# EAGLE board ir (EAGLE 9.5.1)
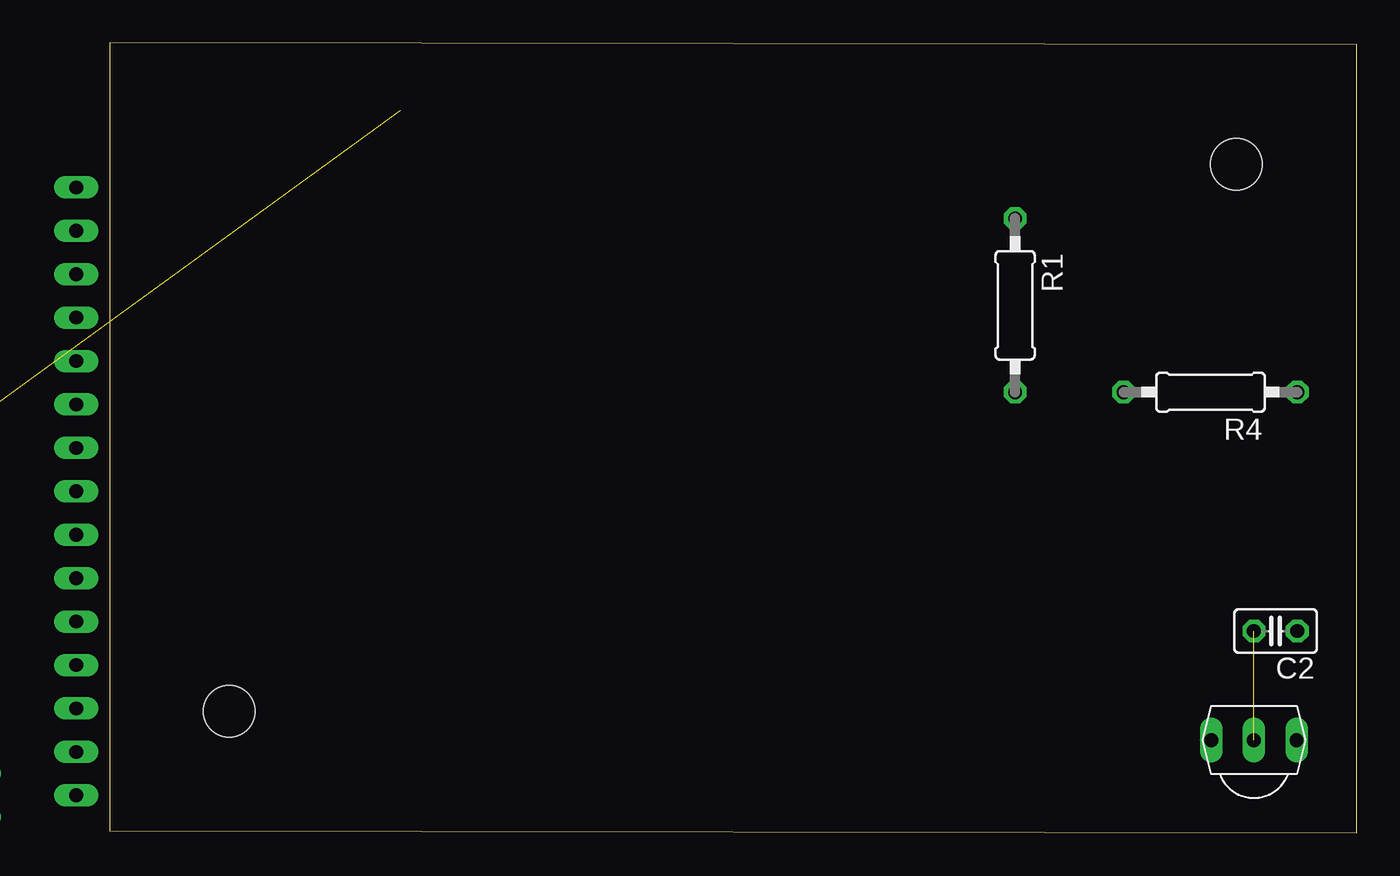
[diagram p0: board, top side]
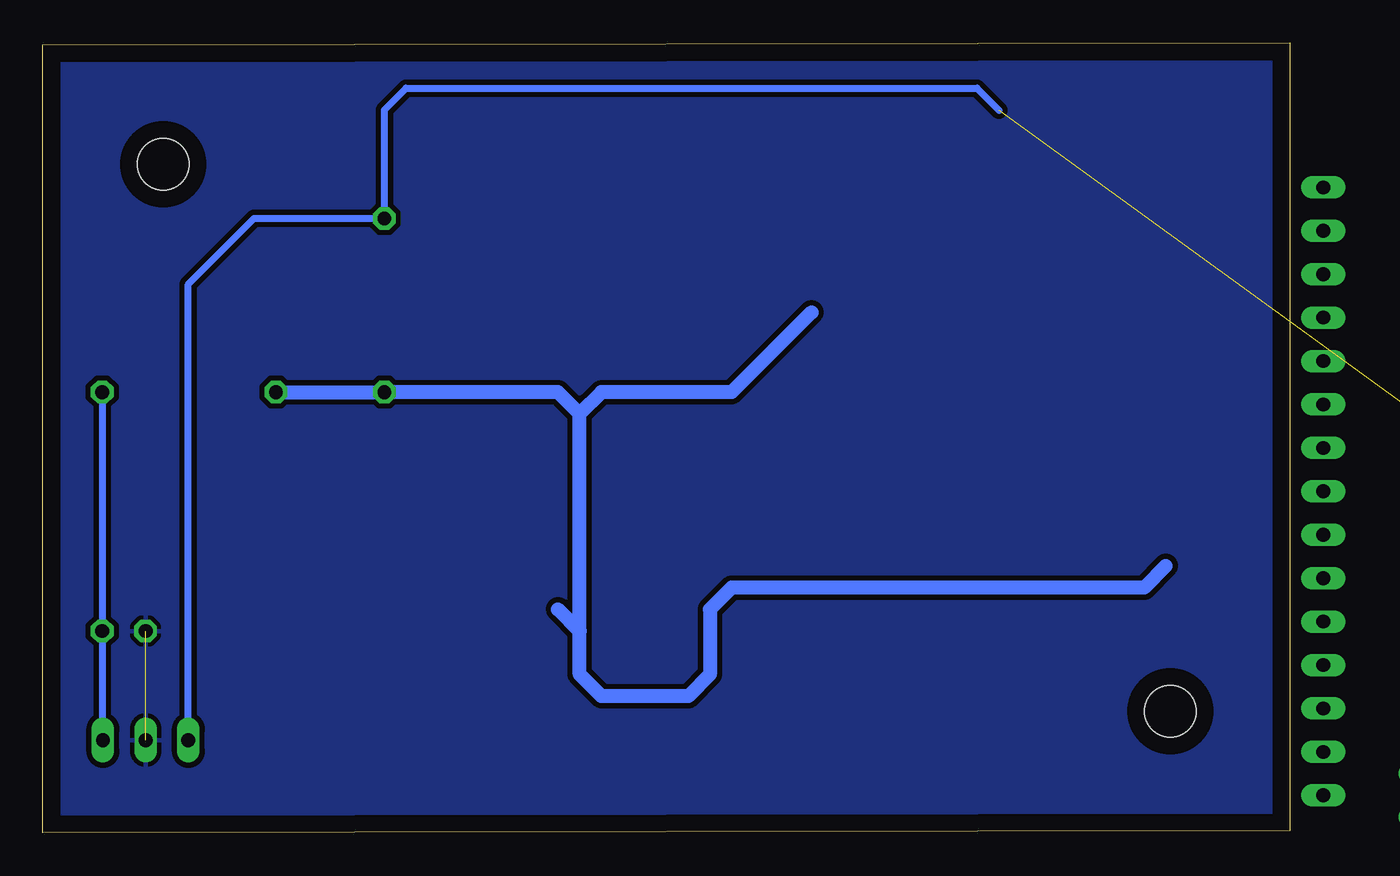
[diagram p1: board, bottom side, seen from below]

Size 72.95 x 46.22 mm. Coordinates in mm from the lower left corner, seen from the top.
Outline: 0,0.13 72.95,0 72.95,46.09 0,46.22 0,0.13
Copper layers (1*16): Top 0.035mm / dielectric 1.5mm / Bottom 0.035mm
Design rules "default *": minimum track width 6mil, minimum drill 0.35mm, track to track 6mil, track to pad 6mil, pad to pad 6mil, via to via 6mil, smd to smd 6mil, copper to edge 40mil, drill to drill 6mil, minimum pad ring 10mil, minimum via ring 8mil, stop-mask expansion 4mil, vias tented up to drill 0mil, thermal gap 10mil
Holes 3 mm at 6.99,7.11 65.91,39.12

## Footprints (pad centres in the part's own frame; a part is rotated, then mirrored left to right if it is on the bottom)
C025-025X050 = drill 0.813 octagon: 1 -1.27,0; 2 1.27,0
0207/10 = drill 0.813 octagon: 1 -5.08,0; 2 5.08,0
TSOP18XX = drill 0.813 long: GND -0.001,-0.027; OUT -2.501,-0.027; VCC 2.499,-0.027
NANO = drill 0.8 long: 3.3V -10.16,24.13; 5V -10.16,-1.27; A0 -10.16,19.05; A1 -10.16,16.51; A2 -10.16,13.97; A3 -10.16,11.43; A4 -10.16,8.89; A5 -10.16,6.35; A6 -10.16,3.81; A7 -10.16,1.27; AREF -10.16,21.59; D2 5.08,1.27; D3 5.08,3.81; D4 5.08,6.35; D5 5.08,8.89; D6 5.08,11.43; D7 5.08,13.97; D8 5.08,16.51; D9 5.08,19.05; D10 5.08,21.59; D11 5.08,24.13; D12 5.08,26.67; D13 -10.16,26.67; GND -10.16,-6.35; GND1 5.08,-1.27; RAW -10.16,-8.89; RST -10.16,-3.81; RST1 5.08,-3.81; RX1 5.08,-6.35; TX0 5.08,-8.89 | drill 0.8: ICSP1 -5.08,-10.16; ICSP2 -5.08,-7.62; ICSP3 -2.54,-10.16; ICSP4 -2.54,-7.62; ICSP5 0,-10.16; ICSP6 0,-7.62

## Placement (x,y rotation side)
C2  100nF  [C025-025X050]  68.2,11.81 180 top
R1  10k  [0207/10]  52.96,30.86 270 top
R4  10R  [0207/10]  64.39,25.78 180 top
U$1  TSOP4838  [TSOP18XX]  66.93,5.46 0 top
U$2  NANO  [NANO]  -7.05,11.09 0 top

## Library data of the parts
C2 = rcl; SPICEPREFIX: C
R1 R4 = rcl; SPICEPREFIX: R
U$1 = tsop
U$2 = Arduino-clone

## Nets
GND: C2.2 U$1.GND
N$7: R1.1 U$1.OUT U$2.A5
N$10: C2.1 R4.1 U$1.VCC
VCC: R1.2 R4.2

## Tracks (layer width: path | path; a pad name or v marks a point on that pad's centre or on a via)
GND  (1 unrouted)
  pour Bottom (isolate 0.305): 0.95,45.09 71.95,45.09 71.95,1.09 0.95,1.09
N$7  (1 unrouted)
  Bottom 0.406: U$1.OUT 64.43,32.09 60.58,35.94 R1.1 52.96,42.29 51.69,43.56 18.29,43.56 16.99,42.27
N$10
  Bottom 0.406: R4.1 C2.1 69.47,5.48 U$1.VCC
VCC
  Bottom 0.813: 7.24,15.62 8.51,14.35 32.64,14.35 33.91,13.08 33.91,9.27 35.18,8 40.26,8 41.53,9.27 41.53,11.81 | 41.53,11.81 41.53,24.51 | 41.53,24.51 42.8,25.78 R1.2 R4.2 | 41.53,11.81 42.8,13.08 | 41.53,24.51 40.26,25.78 32.64,25.78 27.96,30.46